# Altium PCB PCB2.PcbDoc
Units mm, origin at the board's own origin, x right, y up, seen from the top; angles counter-clockwise.
Board outline 56.39 x 33.27 mm, 2 copper layers (Top Layer, Bottom Layer); 32 components, 51 nets, 166 pads, 27 vias.
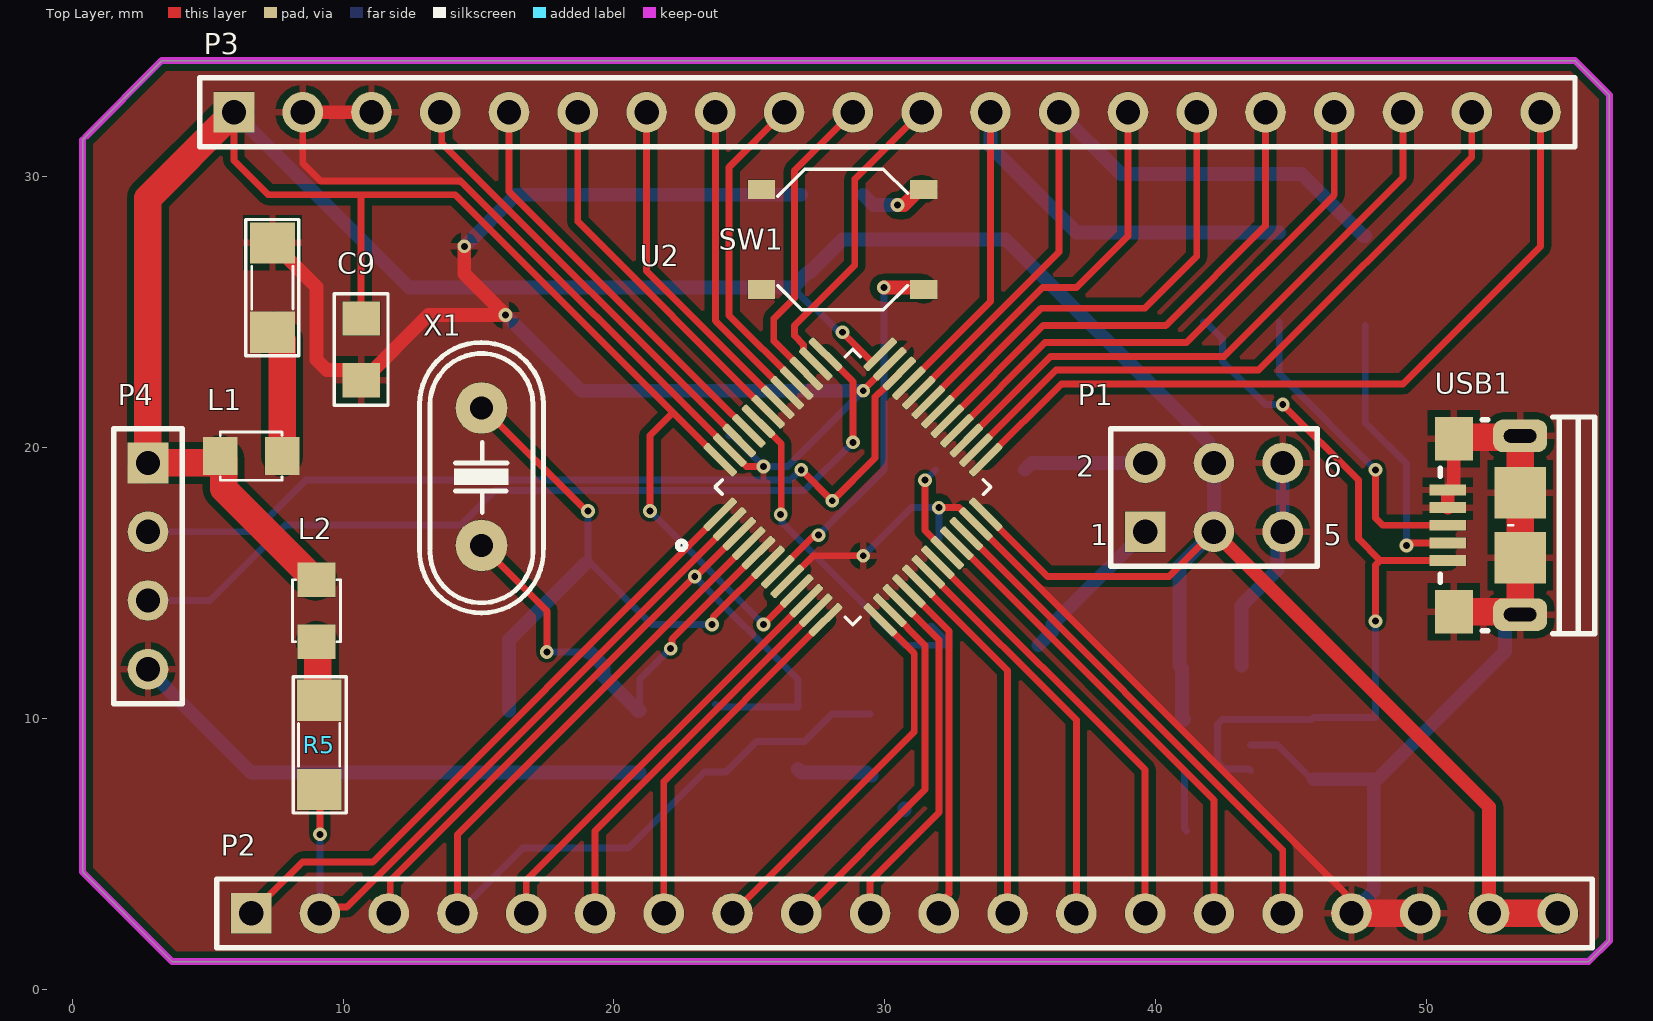
[diagram p0: Top Layer view]
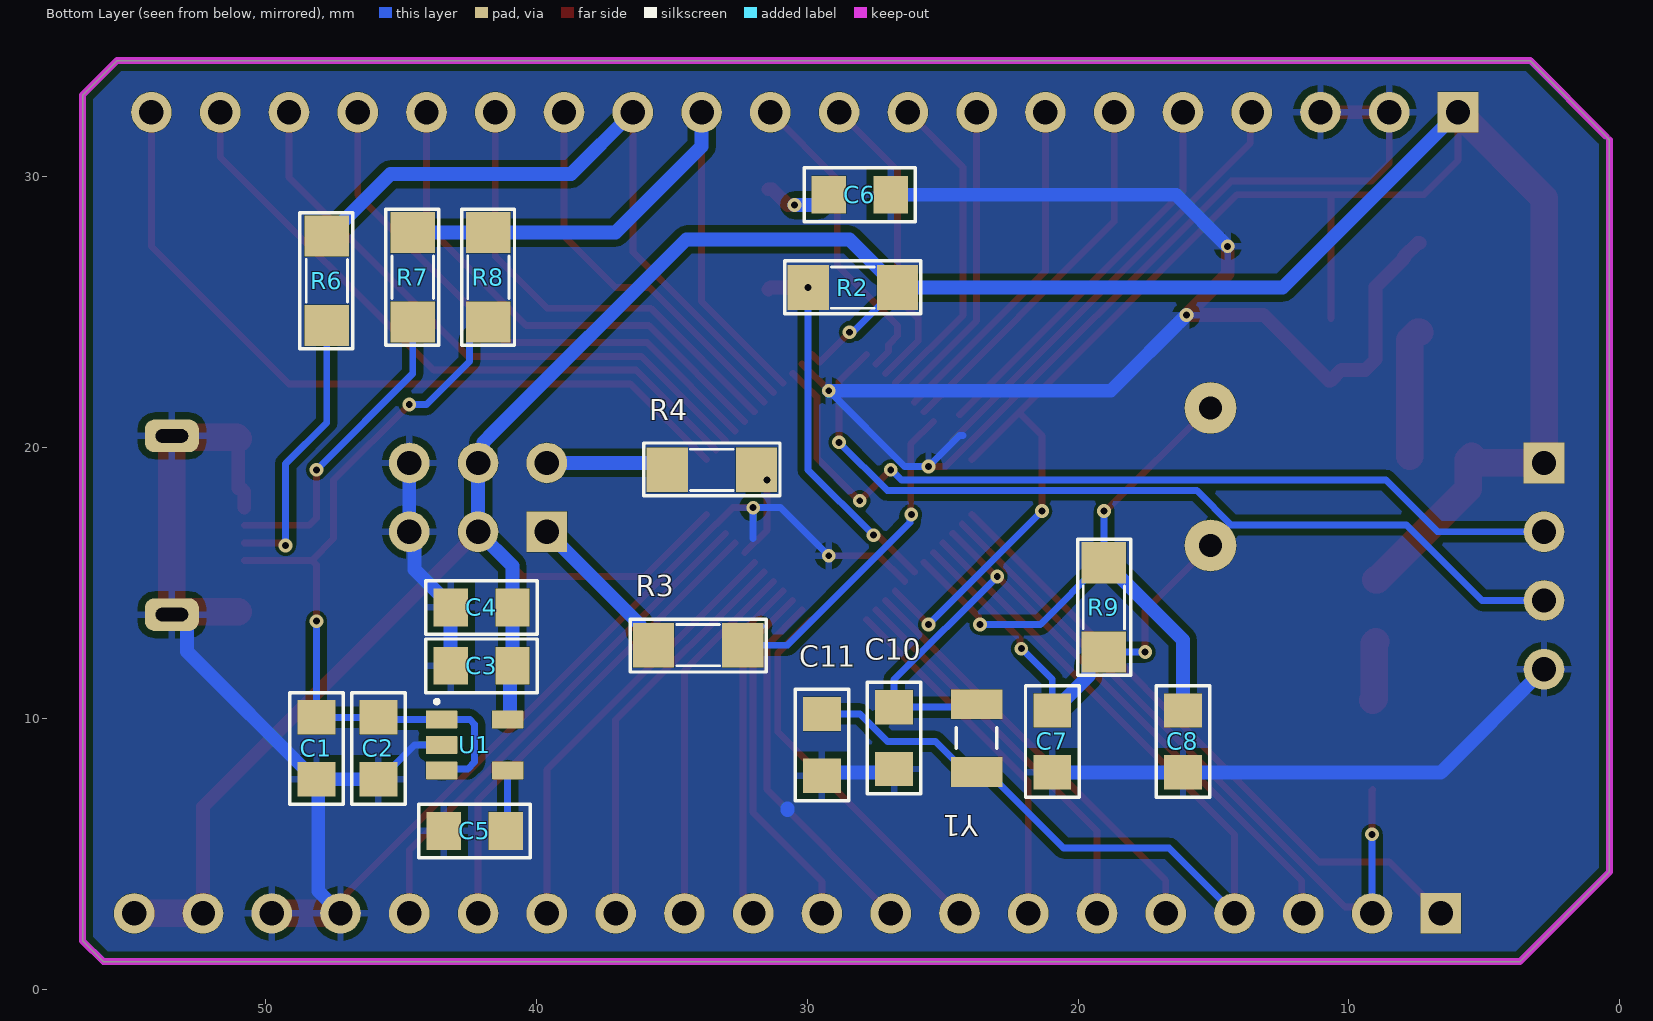
[diagram p1: Bottom Layer view, seen from below]
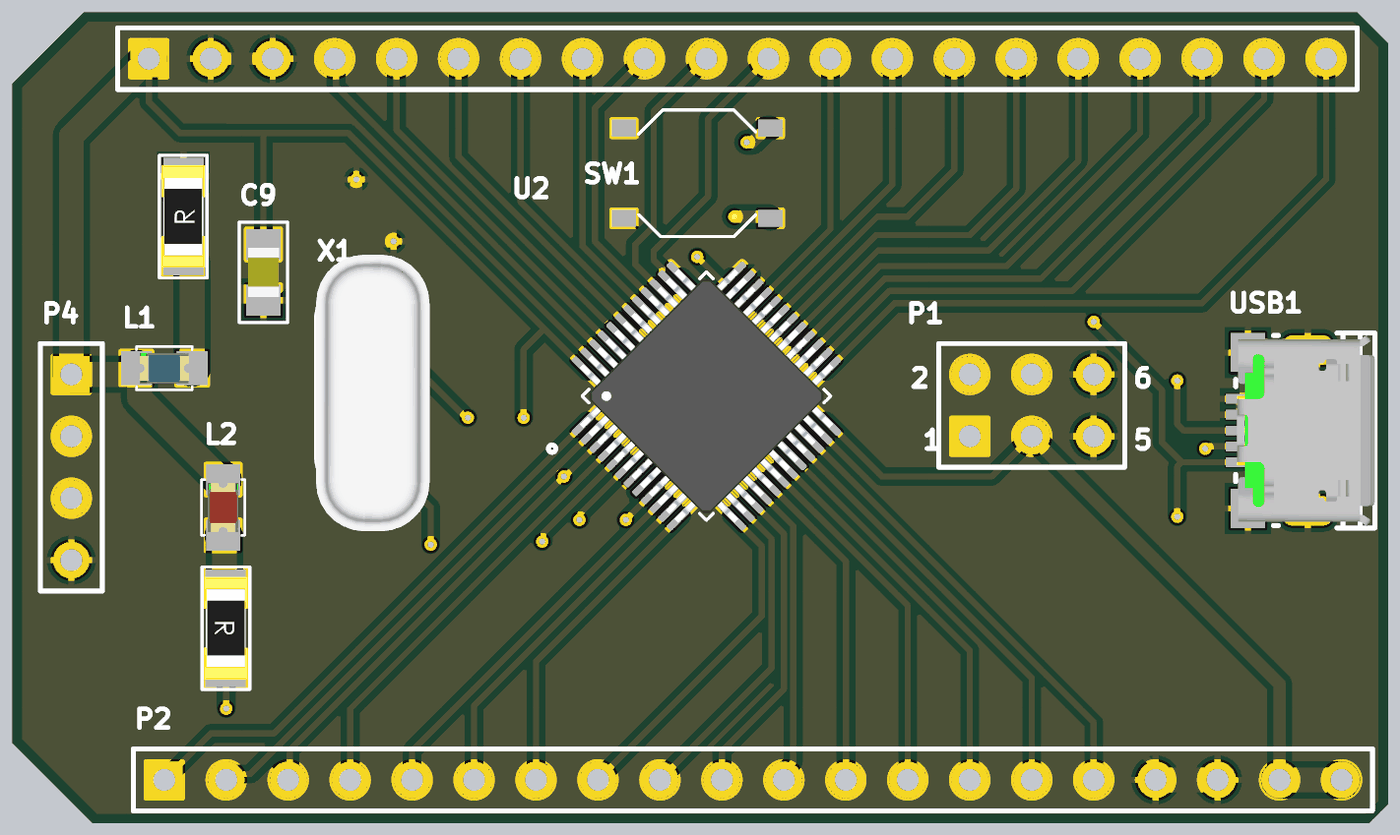
[diagram p2: 3D render of the assembled board from above, using the file's embedded part models]
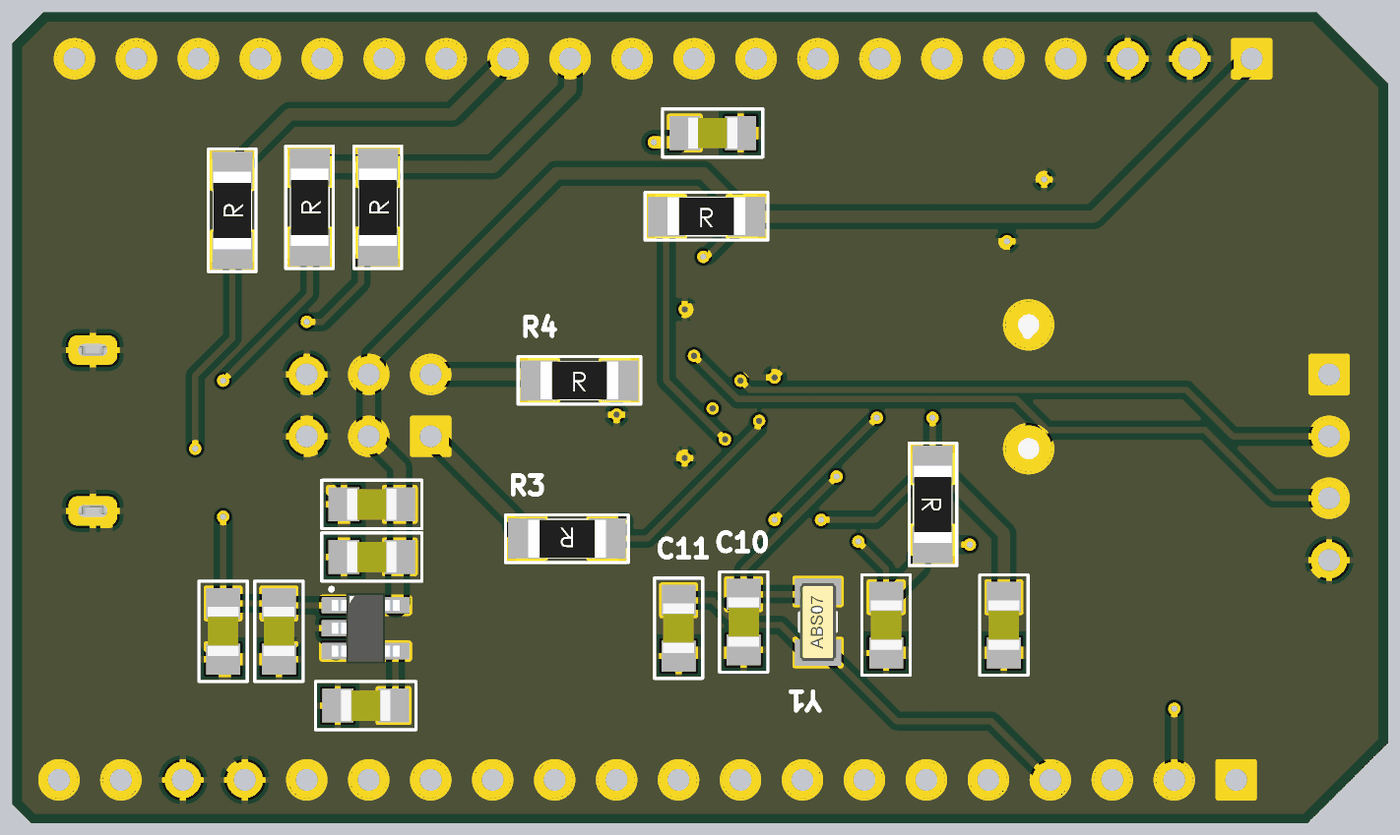
[diagram p3: 3D render of the assembled board from below, using the file's embedded part models]

## Layer stack, top to bottom
Top Solder: solder mask 0.0102, Solder Resist, Dk 3.5
Top Layer: signal copper 0.0356
Dielectric 1: dielectric 0.32, FR-4, Dk 4.8
Bottom Layer: signal copper 0.0356
Bottom Solder: solder mask 0.0102, Solder Resist, Dk 3.5

## Board outline
3.683,1.016 0.381,4.318 0.381,31.369 0.508,31.496 3.302,34.29 55.499,34.29 56.769,33.02 56.769,1.778 56.007,1.016

## Design rules (kind name [scope] priority, off if disabled: settings)
Clearance [All] p1: gap=0 ignorepadtopadclearanceinfootprint=FALSE except(0.127: Arc-Arc Arc-Track Track-Track; 0.254: Arc-Fill Arc-Poly Arc-Region Track-Fill Track-Poly Track-Region Fill-Hole Poly-Hole Region-Hole)
PolygonConnect [All] p1: connectstyle=Relief reliefconductorwidth=0.254 reliefentries=4 polygonreliefangle="90 Angle" airgapwidth=0.254
RoutingVias [All] p1: holewidth=0.381 width=0.762 viastyle="Through Hole" minholewidth=0.254 minwidth=0.508 maxholewidth=0.711 maxwidth=1.27
SolderMaskExpansion [All] p1: expansion=0.102 istentingtop=FALSE
Width [All] p1: maxlimit=1.016 minlimit=0.254 preferedwidth=0.508 minimp=50.000000 maximp=50.000000 favimp=50.000000
30 further rules are at their usual default settings.

## Components (designator, comment, footprint, x,y, rotation, side; value= is the part's Value field where it differs from the comment)
C1 "103" C-0805 48.133,8.89 r90 bottom
C2 "103" C-0805 45.847,8.89 r90 bottom
C3 "103" C-0805 42.037,11.938 r180 bottom
C4 "103" C-0805 42.037,14.097 r180 bottom
C5 "103" C-0805 42.291,5.842 r180 bottom
C6 "103" C-0805 28.067,29.337 r0 bottom
C7 "103" C-0805 20.955,9.144 r90 bottom
C8 "103" C-0805 16.129,9.144 r90 bottom
C9 "103" C-0805 10.668,23.622 r90 top
C10 "103" C-0805 26.797,9.271 r90 bottom
C11 "103" C-0805 29.464,9.017 r90 bottom
L1 "LED 0805" LED-0805-Blue 5.461,19.685 r0 top
L2 "LED 0805" LED-0805-Red 9.017,15.113 r270 top
P1 "Header 3X2" HDR2X3 39.624,16.891 r0 top
P2 "Header 20" HDR1X20 6.604,2.794 r0 top
P3 "Header 20" HDR1X20 5.969,32.385 r0 top
P4 "Header 4" HDR1X4 2.794,19.431 r270 top
R1 "240" SM-1206 7.391,25.908 r90 top value="R1/4W - 1K"
R2 "1k" SM-1206 28.321,25.908 r180 bottom value="R1/4W - 1K"
R3 "100k" SM-1206 34.036,12.7 r0 bottom value="R1/4W - 1K"
R4 "100k" SM-1206 33.528,19.177 r180 bottom value="R1/4W - 1K"
R5 "240" SM-1206 9.119,9.017 r270 top value="R1/4W - 1K"
R6 "20" SM-1206 47.752,26.162 r90 bottom value="R1/4W - 1K"
R7 "20" SM-1206 44.577,26.289 r90 bottom value="R1/4W - 1K"
R8 "4.7k" SM-1206 41.783,26.289 r90 bottom value="R1/4W - 1K"
R9 "1k" SM-1206 19.05,14.097 r270 bottom value="R1/4W - 1K"
SW1 "SMD-BUTTON(4P-5.2X5.2X1.5MM-SKQGAKE010)" SW4-SMD-5.2X5.2X1.5MM 28.448,27.686 r0 top
U1 "RT9193-33GB" SOT94P279X129-5N 42.291,9.017 r180 bottom
U2 "STM32F103C8T6" QFP50P900X900X160-48N 28.829,18.542 r45 top
USB1 "USB Micro 5p DIP" "USB Micro 5p DIP" 53.475,17.13 r90 top
X1 "4Mhz" XT2 15.113,18.923 r90 top
Y1 "ABS07-32.768KHZ-T" XTAL_ABS07-32.768KHZ-T 23.749,9.271 r90 bottom

## Footprints (in the part's own frame and the unit in brackets; to place one, negate y for a bottom-side part, rotate by r counter-clockwise, add the part's x,y. Pads: shape width x height; smd on the part's side, far side on the other; paste and mask are expansions set on the pad)
C-0805 [mil] "Compoment SMD 80x50mil"
  rect 50x55 smd: 1(-45,0) 2(45,0)
  silkscreen extent -81,-39 81,39, body extent -40,-25 40,25, height 24
HDR1X4 [mm] "Connector; Header; 4 Position"
  rect 1.5x1.5 hole 0.9: 1(0,0)
  round 1.5 hole 0.9: 2(2.54,0) 3(5.08,0) 4(7.62,0)
  silkscreen extent -1.27,-1.27 8.89,1.27, body extent -1.27,-1.27 8.89,1.27, height 7
HDR1X20 [mm] "Connector; Header; 20 Position"
  rect 1.5x1.5 hole 0.9: 1(0,0)
  round 1.5 hole 0.9: 2(2.54,0) 3(5.08,0) 4(7.62,0) 5(10.16,0) 6(12.7,0) 7(15.24,0) 8(17.78,0) 9(20.32,0) 10(22.86,0) 11(25.4,0) 12(27.94,0) 13(30.48,0) 14(33.02,0) 15(35.56,0) 16(38.1,0) 17(40.64,0) 18(43.18,0) 19(45.72,0) 20(48.26,0)
  silkscreen extent -1.27,-1.27 49.53,1.27, body extent -1.27,-1.3 49.53,1.27, height 7
HDR2X3 [mm] "Connector; Header; 3x2 Position"
  rect 1.5x1.5 hole 0.9: 1(0,0)
  round 1.5 hole 0.9: 2(0,2.54) 3(2.54,0) 4(2.54,2.54) 5(5.08,0) 6(5.08,2.54)
  silkscreen extent -1.27,-1.27 6.35,3.81, body extent -1.27,-1.27 6.35,3.81, height 7
LED-0805-Blue [mil]
  rect 50x55 smd: 1(0,0) 2(90,0)
  silkscreen extent 0,-35 90,35, body extent 5,-25 85,25, height 43
LED-0805-Red [mil]
  rect 50x55 smd: 1(0,0) 2(90,0)
  silkscreen extent 0,-35 90,35, body extent 5,-25 85,25, height 43
QFP50P900X900X160-48N [mm]
  rrect50% 1.56x0.28 smd: 1(-4.18,2.75) 2(-4.18,2.25) 3(-4.18,1.75) 4(-4.18,1.25) 5(-4.18,0.75) 6(-4.18,0.25) 7(-4.18,-0.25) 8(-4.18,-0.75) 9(-4.18,-1.25) 10(-4.18,-1.75) 11(-4.18,-2.25) 12(-4.18,-2.75) 25(4.18,-2.75) 26(4.18,-2.25) 27(4.18,-1.75) 28(4.18,-1.25) 29(4.18,-0.75) 30(4.18,-0.25) 31(4.18,0.25) 32(4.18,0.75) 33(4.18,1.25) 34(4.18,1.75) 35(4.18,2.25) 36(4.18,2.75)
  rrect50% 0.28x1.56 smd: 13(-2.75,-4.18) 14(-2.25,-4.18) 15(-1.75,-4.18) 16(-1.25,-4.18) 17(-0.75,-4.18) 18(-0.25,-4.18) 19(0.25,-4.18) 20(0.75,-4.18) 21(1.25,-4.18) 22(1.75,-4.18) 23(2.25,-4.18) 24(2.75,-4.18) 37(2.75,4.18) 38(2.25,4.18) 39(1.75,4.18) 40(1.25,4.18) 41(0.75,4.18) 42(0.25,4.18) 43(-0.25,4.18) 44(-0.75,4.18) 45(-1.25,4.18) 46(-1.75,4.18) 47(-2.25,4.18) 48(-2.75,4.18)
  silkscreen extent -6.15,-3.6 3.6,3.6, body extent -4.5,-4.5 4.5,4.5, height 1.6
SM-1206 [mil] "Compoment SMD 120x60mil"
  rect 60x65 smd: 1(-65,0) 2(65,0)
  silkscreen extent -99,-38 99,39, body extent -83,-35 83,36, height 25
SOT94P279X129-5N [mm]
  rrect12% 1.17x0.67 smd: 1(-1.22,0.94) 2(-1.22,0) 3(-1.22,-0.94) 4(1.22,-0.94) 5(1.22,0.94)
  silkscreen extent -1.47,1.53 -1.33,1.67, body extent -1.4,-1.45 1.4,1.45, height 1.3
SW4-SMD-5.2X5.2X1.5MM [mm]
  rect 1x0.7 smd: 1(-3,1.85) 2(3,1.85) 3(-3,-1.85) 4(3,-1.85)
  silkscreen extent -2.4,-2.6 2.4,2.6
"USB Micro 5p DIP" [mm]
  rect 0.4x1.35 smd mask+0.05: 1(-1.3,2.675) 2(-0.65,2.675) 3(0,2.675) 4(0.65,2.675) 5(1.3,2.675)
  rrect60% 1.2x2 hole 0.5 slot 1.2 at 90 deg: 5(-3.3,0) 5(3.3,0)
  rect 1.6x1.4 smd: 5(-3.2,2.45) 5(3.2,2.45)
  rect 1.9x1.9 smd paste-10: 5(-1.2,0) 5(1.2,0)
  silkscreen extent -4,-2.75 4,2.95, body extent -3.93,-2.76 3.93,2.9, height 2.85
XT2 [mil] "Footpin for Crystal 2 pin"
  round 75 hole 34: 1(-100,0) 2(100,0)
  silkscreen extent -198,-90 195,90, body extent -233,-93 213,90, height 138
XTAL_ABS07-32.768KHZ-T [mm]
  rect 1.1x1.9 smd: 1(-1.25,0) 2(1.25,0)
  silkscreen extent -0.38,-0.75 0.38,0.75, body extent -1.6,-0.75 1.6,0.75, height 0.89

## Part data
C1 C2 C3 C4 C5 C6 C7 C8 C9 C10 C11: library part C, "Cap SMD"
L1: library part "LED 0805 Xanh Duong", "Dán", Chung_Loai=Dán, Don_Vi=Con, Ma_Hang=MH002327, Ten_Linh_Kien="LED 0805 Màu Xanh Dương (Blue)"
L2: library part "LED 0805 Do", "Dán", Chung_Loai=Dán, Don_Vi=Con, Ma_Hang=MH000897, Ten_Linh_Kien="LED 0805 Màu Đỏ (Red)"
P1: "Header, 3-Pin, Dual row", LatestRevisionDate=17-Jul-2002, LatestRevisionNote="Re-released for DXP Platform.", Publisher="Altium Limited"
P2 P3: "Header, 20-Pin", LatestRevisionDate=17-Jul-2002, LatestRevisionNote="Re-released for DXP Platform.", Publisher="Altium Limited"
P4: "Header, 4-Pin", LatestRevisionDate=17-Jul-2002, LatestRevisionNote="Re-released for DXP Platform.", Publisher="Altium Limited"
R1 R2 R3 R4 R5 R6 R7 R8 R9: library part R, "Resistor 1/4W"
SW1: "Switch Tactile N.O. SPST Button Gull Wing 0.05A 12VDC 3.43N SMD T/R", Package=None, Availability=Unavailable, MF=ALPS, MP=SKQGAKE010, Price=None, SnapEDA_Link=https://www.snapeda.com/parts/SKQGAKE010/ALPS/view-part/51324/?ref=snap
U1: "Linear Voltage Regulator IC Positive Fixed 1 Output 300mA TSOT-23-5", Package="SOT-23-5 Richtek", Check_prices=https://www.snapeda.com/parts/RT9193-33GB/Richtek+USA+Inc./view-part/?ref=eda, Digi-Key_Part_Number=1028-1014-2-ND, MF="Richtek USA", MP=RT9193-33GB, Purchase-URL=https://pricing.snapeda.com/search/part/RT9193-33GB/?ref=eda, SnapEDA_Link=https://www.snapeda.com/parts/RT9193-33GB/Richtek+USA+Inc./view-part/?ref=snap
U2: "ARM® Cortex®-M3 STM32F1 Microcontroller IC 32-Bit 72MHz 64KB (64K x 8) FLASH 48-LQFP (7x7)", Package="LQFP-48 STMicroelectronics", Check_prices=https://www.snapeda.com/parts/STM32F103C8T6/STMicroelectronics/view-part/?ref=eda, MF=STMicroelectronics, MP=STM32F103C8T6, SnapEDA_Link=https://www.snapeda.com/parts/STM32F103C8T6/STMicroelectronics/view-part/?ref=snap
USB1: "USB Type B", Ma_Hang=MH005145, Ten="MicroUSB MK5P DIP"
X1: library part XT2, "Crystal For all Crystal 2pin."
Y1: "32.768 kHz Â±20ppm Crystal 12.5pF 70 kOhms 2-SMD, No Lead", Package="SMD-2 Abracon LLC", Availability="In Stock", Check_prices=https://www.snapeda.com/parts/ABS07-32.768KHZ-T/Abracon+LLC/view-part/?ref=eda, MF=Abracon, MP=ABS07-32.768KHZ-T, Price=None, Purchase-URL=https://pricing.snapeda.com/search/part/ABS07-32.768KHZ-T/?ref=eda, SnapEDA_Link=https://www.snapeda.com/parts/ABS07-32.768KHZ-T/Abracon+LLC/view-part/?ref=snap

## Via types
v1: diameter 0.508, hole 0.254, Top Layer to Bottom Layer, 27 vias

## Nets (pads, with @x,y where several pads share a name; then routed paths per layer and width w, separated by ;. In a path a pad name is that pad's centre, name@x,y a point inside that pad or via, vN(x,y) a via of type N, cw(c..) or ccw(c..) an arc to the next point about the centre after c; other vN are vias at no path point)
3.3V: C3.2 C4.2 C9.2 L1.1 L2.1 P1.3 P1.4 P2.19 P2.20 P3.1 P4.1 R2.2 U1.5 U2.9 U2.24 U2.36 U2.48 | length 152.6
  Top Layer w0.254: P3.1 5.969,30.607 7.239,29.337 10.692,29.337 ; C9.2 10.668,29.313 10.692,29.337 ; v1(21.336,17.653) 21.336,20.447 22.185,21.296 ; U2.48 22.185,21.296 ; v1(25.527,13.462) 25.527,13.467 26.757,14.697 U2.9 ; v1(28.448,24.257) 29.542,23.163 29.561,23.163 U2.36 ; U2.24 36.02,15.24 40.513,15.24 P1.3 ; 10.692,29.337 14.145,29.337 22.185,21.296
  Top Layer w0.508: L1.1@5.461,19.621 L1.1 ; P1.3 52.324,6.731 P2.19
  Top Layer w1.016: L1.1@5.461,19.621 5.271,19.431 P4.1 2.794,29.21 P3.1 ; L1.1 5.588,19.558 5.588,18.479 8.954,15.113 L2.1 ; P2.19 P2.20
  Bottom Layer w0.254: v1(21.336,17.653) v1(25.527,13.462) ; R2.2 26.67,25.845 27.305,25.209 27.369,25.209 28.272,24.306 28.399,24.306 v1(28.448,24.257)
  Bottom Layer w0.508: P3.1 12.446,25.908 R2.2 26.67,25.971 27.178,26.479 27.242,26.479 28.448,27.686 34.478,27.686 41.59,20.574 41.974,20.189 41.974,19.621 P1.4 P1.3 40.894,15.621 C4.2 C3.2 40.982,11.85 40.982,10.038 41.063,9.957 U1.5
5V: C1.2 C2.2 R8.1 U1.1 U1.3 USB1.1 | length 29
  Top Layer w0.254: v1(44.704,21.59) 47.498,18.796 47.498,16.637 48.305,15.83 ; v1(48.133,13.589) 48.133,15.658 48.305,15.83 ; USB1.1 48.305,15.83
  Bottom Layer w0.254: R8.1 41.846,24.638 42.481,24.003 42.481,23.177 44.069,21.59 v1(44.704,21.59) ; U1.3 43.46,8.128 42.545,8.128 42.291,8.382 42.291,9.779 42.469,9.957 U1.1 45.771,9.957 C2.2 C1.2 v1(48.133,13.589)
BOOT0: R3.1 U2.44 | length 13.2
  Top Layer w0.254: U2.44 26.184,20.127 26.184,17.548 v1(26.162,17.526)
  Bottom Layer w0.254: v1(26.162,17.526) 26.211,17.477 26.211,17.223 30.734,12.7 R3.1 32.385,12.763 31.75,13.399 R3.1@31.687,13.399
BOOT1: R4.2 U2.20 | length 3.6
  Top Layer w0.254: v1(31.496,18.796) 31.496,16.936 U2.20
  Bottom Layer w0.254: v1(31.496,18.796) R4.2
GND: C1.1 C2.1 C3.1 C4.1 C5.1 C6.1 C7.1 C8.1 C9.1 C10.1 C11.1 P1.5 P1.6 P2.17 P2.18 P3.2 P3.3 P4.4 R1.2 U1.2 U2.8 U2.23 U2.35 U2.47 USB1.4 USB1.5 | length 174.2
  Top Layer w0.254: P3.2 8.509,30.502 9.166,29.845 14.344,29.845 U2.47 24.289,19.907 24.892,19.304 v1(25.527,19.304) ; U2.8 27.35,16.002 v1(29.21,16.002) ; v1(29.21,22.098) 29.21,22.101 30.194,23.085 U2.35 ; v1(32.004,17.78) 32.755,17.78 33.357,17.177 U2.23 47.006,3.547 47.006,3.032 P2.17
  Top Layer w0.508: R1.2 7.455,27.559 7.963,27.051 7.963,26.987 9.017,25.933 9.017,23.241 9.398,22.86 10.287,22.86 C9.1 10.731,22.479 13.144,24.892 v1(16.002,24.892) 14.478,26.416 v1(14.478,27.432) ; P3.2 P3.3 ; USB1.4 50.8,18.376 50.908,18.484 51.025,18.484 USB1.5@51.025,20.33
  Top Layer w1.016: P2.17 P2.18 ; USB1.5@51.025,13.93 52.975,13.93 53.075,13.83 53.475,13.83 53.475,15.93 53.475,18.33 53.475,20.43 53.425,20.38 51.075,20.38 USB1.5@51.025,20.33
  Bottom Layer w0.254: 24.257,20.447 24.384,20.447 v1(25.527,19.304) 26.416,19.304 v1(29.21,22.098) ; v1(29.21,16.002) 30.988,17.78 v1(32.004,17.78) 32.004,16.637 ; U1.2 44.514,9.017 45.783,7.747 C2.1
  Bottom Layer w0.508: P4.4 6.604,8.001 C8.1 C7.1 ; v1(14.478,27.432) 16.383,29.337 C6.1 ; v1(16.002,24.892) 18.796,22.098 v1(29.21,22.098) ; C10.1 26.924,8.001 29.337,8.001 C11.1 C11.1@29.527,7.874 ; 30.734,6.604 30.734,6.667 ; C3.1 C4.1 43.18,14.16 44.514,15.495 44.514,16.701 P1.5 P1.6 ; C2.1 48.069,7.747 48.069,3.619 P2.17 ; C1.1 48.197,7.747 52.917,12.468 52.917,13.492 53.255,13.83 USB1.5@53.475,13.83
NetC5_2: C5.2 U1.4 | length 2.3
  Bottom Layer w0.254: U1.4 41.071,5.919 C5.2
NetC6_2: C6.2 SW1.2 | length 2.6
  Top Layer w0.508: v1(30.48,28.956) 30.718,28.956 31.298,29.536 SW1.2
  Bottom Layer w0.508: C6.2 29.591,28.956 v1(30.48,28.956)
NetL1_2: L1.2 R1.1 | length 4.8
  Top Layer w1.016: R1.1 7.455,24.257 7.747,23.965 L1.2
NetL2_2: L2.2 R5.1 | length 2.2
  Top Layer w1.016: L2.2 9.068,12.776 9.068,10.719 R5.1
NetP1_1: P1.1 R3.2 | length 5.8
  Bottom Layer w0.508: R3.2 36.195,13.208 36.195,13.462 P1.1
NetP1_2: P1.2 R4.1 | length 4.6
  Bottom Layer w0.508: R4.1 35.433,19.431 P1.2
NetR6_1: R6.1 USB1.2 | length 10.3
  Top Layer w0.254: v1(49.276,16.383) 49.345,16.383 49.442,16.48 USB1.2
  Bottom Layer w0.254: R6.1 47.752,20.926 49.276,19.402 v1(49.276,16.383)
NetR7_1: R7.1 USB1.3 | length 11.5
  Top Layer w0.254: v1(48.133,19.177) 48.133,17.399 48.402,17.13 USB1.3
  Bottom Layer w0.254: R7.1 44.577,22.733 v1(48.133,19.177)
PA0: P2.5 U2.10 | length 15.8
  Top Layer w0.254: P2.5 16.764,4.002 U2.10
PA1: P2.6 U2.11 | length 14.6
  Top Layer w0.254: P2.6 19.304,5.835 U2.11
PA2: P2.7 U2.12 | length 13.3
  Top Layer w0.254: P2.7 21.844,7.668 U2.12
PA3: P2.8 U2.13 | length 14.1
  Top Layer w0.254: P2.8 31.097,9.507 31.097,12.385 U2.13
PA4: P2.9 U2.14 | length 13.6
  Top Layer w0.254: P2.9 31.496,7.366 31.496,12.693 U2.14
PA5: P2.10 U2.15 | length 13.2
  Top Layer w0.254: P2.10 29.464,3.979 32.004,6.519 32.004,12.892 U2.15
PA6: P2.11 U2.16 | length 12.7
  Top Layer w0.254: U2.16 32.385,13.218 32.385,3.512 32.004,3.131 P2.11
PA7: P2.12 U2.17 | length 13.6
  Top Layer w0.254: U2.17 34.544,11.766 P2.12
PA8: P3.16 U2.29 | length 18.9
  Top Layer w0.254: U2.29 35.859,24.511 40.386,24.511 44.069,28.194 P3.16
PA9: P3.15 U2.30 | length 17.3
  Top Layer w0.254: U2.30 35.787,25.146 39.624,25.146 41.529,27.051 P3.15
PA10: P3.14 U2.31 | length 14.5
  Top Layer w0.254: U2.31 35.841,25.908 37.084,25.908 38.989,27.813 P3.14
PA11: P3.13 R6.2 U2.32 | length 25.7
  Top Layer w0.254: U2.32 36.449,27.223 P3.13
  Bottom Layer w0.508: P3.13 38.735,30.099 45.402,30.099 47.688,27.813 R6.2
PA12: P3.12 R7.2 R8.2 U2.33 | length 24.5
  Top Layer w0.254: U2.33 33.909,25.39 P3.12
  Bottom Layer w0.508: P3.12 33.909,31.115 37.084,27.94 R8.2 R7.2
PA15: P3.11 U2.38 | length 11.6
  Top Layer w0.254: U2.38 27.012,23.541 27.012,23.788 26.67,24.13 26.67,24.511 28.9,26.741 28.9,29.916 P3.11
PB0: P2.13 U2.18 | length 14.9
  Top Layer w0.254: U2.18 37.084,9.933 P2.13
PB1: P2.14 U2.19 | length 16.1
  Top Layer w0.254: U2.19 39.624,8.101 P2.14
PB3: P3.10 U2.39 | length 11.4
  Top Layer w0.254: U2.39 25.908,23.938 25.908,24.765 26.67,25.527 26.67,30.226 P3.10
PB4: P3.9 U2.40 | length 11.9
  Top Layer w0.254: P3.9 24.257,30.353 24.257,24.882 U2.40
PB5: P3.8 U2.41 | length 11.5
  Top Layer w0.254: P3.8 23.749,24.683 U2.41
PB6: P3.7 U2.42 | length 12.7
  Top Layer w0.254: P3.7 21.209,26.516 U2.42
PB7: P3.6 U2.43 | length 14
  Top Layer w0.254: P3.6 18.669,28.348 U2.43
PB8: P3.5 U2.45 | length 14.6
  Top Layer w0.254: P3.5 16.129,29.464 24.382,21.211 24.386,21.211
PB9: P3.4 U2.46 | length 16.7
  Top Layer w0.254: P3.4 13.642,32.332 13.642,31.254 U2.46
PB10: P2.15 U2.21 | length 17.6
  Top Layer w0.254: U2.21 42.164,6.975 P2.15
PB11: P2.16 U2.22 | length 18.9
  Top Layer w0.254: U2.22 44.704,5.142 P2.16
PB12: P3.20 U2.25 | length 28.7
  Top Layer w0.254: U2.25 36.528,22.352 49.149,22.352 54.229,27.432 P3.20
PB13: P3.19 U2.26 | length 24.4
  Top Layer w0.254: U2.26 36.329,22.86 43.815,22.86 51.689,30.734 P3.19
PB14: P3.18 U2.27 | length 22.6
  Top Layer w0.254: U2.27 36.13,23.368 42.545,23.368 49.149,29.972 P3.18
PB15: P3.17 U2.28 | length 20.6
  Top Layer w0.254: U2.28 35.931,23.876 41.148,23.876 46.609,29.337 P3.17
PC13: P2.2 R5.2 U2.2 | length 25.7
  Top Layer w0.254: R5.2 9.144,7.341 v1(9.144,5.715) ; P2.2 9.382,3.032 10.137,3.032 U2.2
  Bottom Layer w0.254: P2.2 v1(9.144,5.715)
PC14: C10.2 P2.3 U2.3 Y1.2 | length 28.9
  Top Layer w0.254: P2.3 11.741,2.851 11.741,3.994 v1(22.987,15.24) 23.034,15.24 24.617,16.824 U2.3
  Bottom Layer w0.254: v1(22.987,15.24) 26.797,11.43 C10.2 23.856,10.414 Y1.2
PC15: C11.2 P2.4 U2.4 Y1.1 | length 36.4
  Top Layer w0.254: P2.4 14.224,5.705 U2.4
  Bottom Layer w0.254: P2.4 16.637,5.207 20.535,5.207 23.349,8.021 Y1.1 24.149,8.021 25.272,9.144 27.04,9.144 28.056,10.16 C11.2
PD0: C7.2 R9.2 U2.5 X1.1 | length 17.1
  Top Layer w0.254: X1.1 17.526,13.97 v1(17.526,12.446) ; v1(22.098,12.573) 22.147,12.622 22.147,12.92 U2.5
  Bottom Layer w0.254: v1(17.526,12.446) R9.2 ; C7.2 20.955,11.43 v1(22.098,12.573)
  Bottom Layer w0.508: R9.2 19.113,12.446 19.621,11.938 19.621,11.557 20.892,10.287 C7.2
PD1: C8.2 R9.1 U2.6 X1.2 | length 22.8
  Top Layer w0.254: X1.2 15.176,21.463 18.986,17.653 v1(19.05,17.653) ; v1(23.622,13.462) 23.671,13.511 23.671,13.737 U2.6
  Bottom Layer w0.254: R9.1@18.986,15.748 R9.1 ; v1(19.05,17.653) R9.1 ; v1(23.622,13.462) 21.399,13.462 19.113,15.748 R9.1
  Bottom Layer w0.508: C8.2 16.129,12.89 R9.1@18.986,15.748
RESET: R2.1 SW1.4 U2.7 | length 13.7
  Top Layer w0.254: U2.7 27.356,16.715 27.51,16.715 v1(27.559,16.764)
  Top Layer w0.508: v1(29.972,25.908) 31.376,25.908 SW1.4
  Bottom Layer w0.254: v1(27.559,16.764) 29.972,19.177 v1(29.972,25.908)
SWDCLK: P4.3 U2.37 | length 32.1
  Top Layer w0.254: U2.37 28.829,22.431 v1(28.829,20.193)
  Bottom Layer w0.254: P4.3 5.08,14.351 7.874,17.145 14.348,17.145 15.618,18.415 27.051,18.415 v1(28.829,20.193)
SWDIO: P4.2 U2.34 | length 32.4
  Top Layer w0.254: v1(26.924,19.177) v1(28.067,18.034) 29.644,19.611 29.644,21.875 29.792,22.024 29.817,22.024 30.529,22.735 U2.34
  Bottom Layer w0.254: P4.2 6.731,16.891 8.636,18.796 26.521,18.796 26.902,19.177 v1(26.924,19.177)
VBAT: P2.1 U2.1 | length 23.4
  Top Layer w0.254: P2.1 8.509,4.699 11.097,4.699 U2.1
pads on no net: SW1.1 SW1.3

## Polygon pours and split planes (outlines as drawn)
GND on Bottom Layer "GND_L02_P000" (solid, pour order 0): 0.381,31.369 3.302,34.29 55.499,34.29 56.769,33.02 56.769,1.778 56.896,1.651 56.134,0.889 3.556,0.889 0.127,4.318 0.127,4.445
GND on Top Layer "GND_L01_P001" (solid, pour order 1): 0.254,31.496 0.254,31.623 3.175,34.544 55.499,34.544 55.499,34.29 56.769,33.02 56.769,1.651 56.642,1.651 55.753,0.762 3.683,0.762 0.381,4.064

## Keep-outs
Keep-Out Layer:
  lines w0.254: 0.381,31.369 0.381,5.461 0.381,4.318 3.683,1.016 56.007,1.016 56.769,1.778 56.769,33.02 55.499,34.29 3.302,34.29 0.508,31.496

## Text inside footprints (layer, text, board x,y; h text height)
P1: Top Overlay "1" at 37.592,16.383 h0.76; Top Overlay "2" at 37.084,18.923 h0.76; Top Overlay "5" at 46.228,16.383 h0.76; Top Overlay "6" at 46.228,18.923 h0.76